# EAGLE board V1.0.0 (EAGLE 6.6.0)
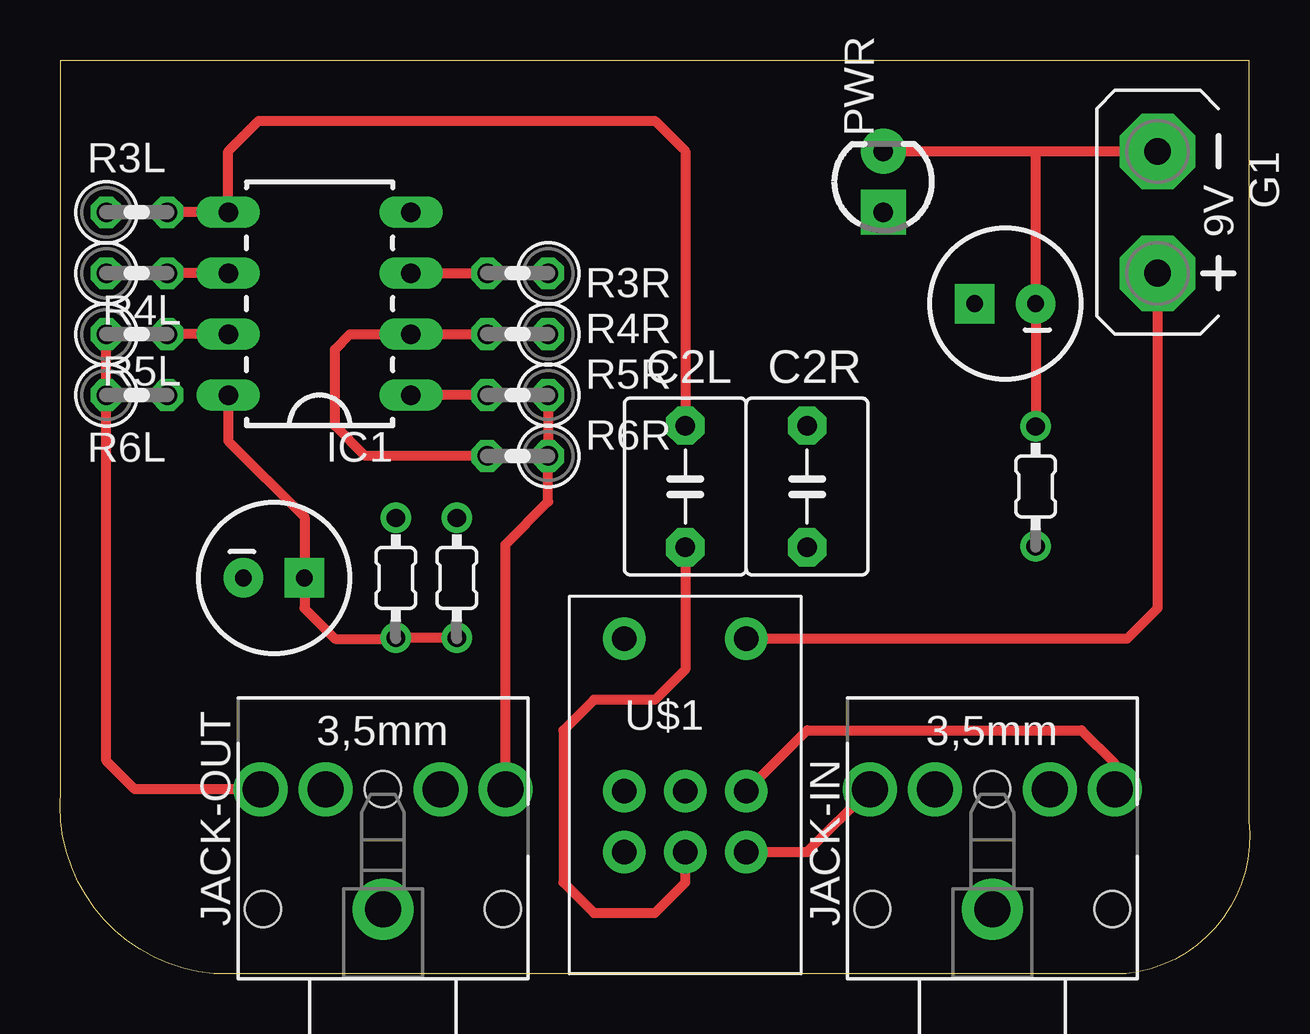
[diagram p0: board, top side]
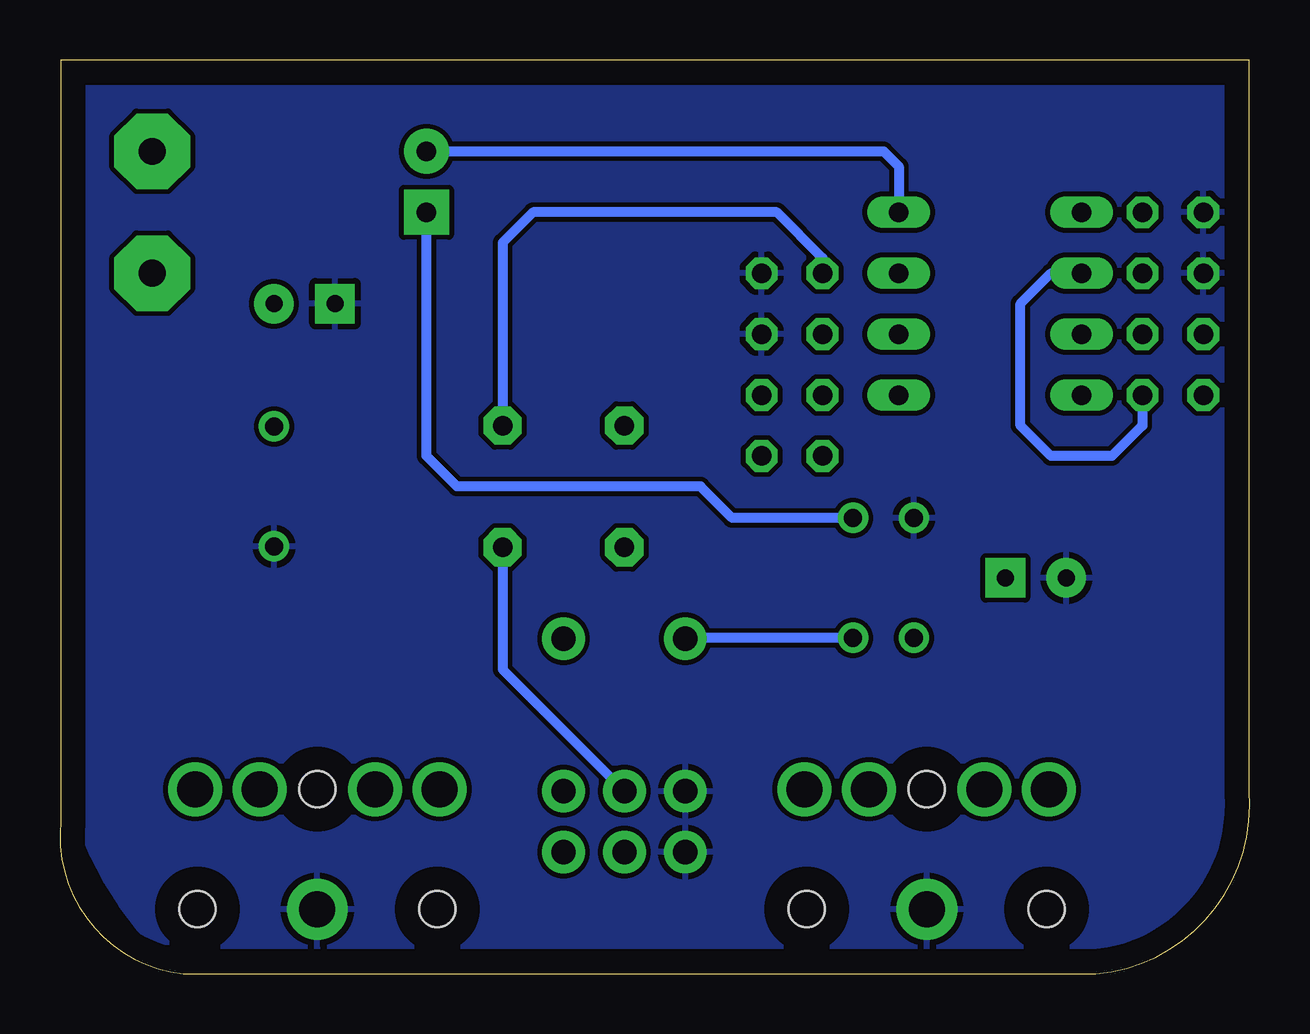
[diagram p1: board, bottom side, seen from below]

Size 49.59 x 38.1 mm. Coordinates in mm from the lower left corner, seen from the top.
Outline: 49.56,38.1 49.56,6.38 arc-90 44.45,0 6.41,0 arc-90 0.03,7.65 0.03,38.1 49.56,38.1
Copper layers (1*16): Top 0.035mm / dielectric 1.5mm / Bottom 0.035mm
Design rules "default": minimum track width 10mil, minimum drill 24mil, track to track 8mil, track to pad 8mil, pad to pad 8mil, via to via 8mil, smd to smd 8mil, copper to edge 40mil, drill to drill 8mil, minimum pad ring 10mil, minimum via ring 8mil, stop-mask expansion 4mil, vias tented up to drill 0mil, thermal gap 10mil
Net classes: 0 default: width 0.254 mm, drill 0.305 mm, clearance 0.152 mm

## Footprints (pad centres in the part's own frame; a part is rotated, then mirrored left to right if it is on the bottom)
CPOL-RADIAL-6.3MM = drill 0.7 pad 1.651 square: 1 1.27,0 | drill 0.7 pad 1.651: 2 -1.27,0
C5B5 = drill 0.813 pad 1.6 octagon: 1 -2.54,0; 2 2.54,0
AB9V = drill 1.118 pad 3.15 octagon: + 0,2.54; - 0,-2.54
DIL-8 = drill 0.813 long: 1 -3.81,-3.81; 2 -1.27,-3.81; 3 1.27,-3.81; 4 3.81,-3.81; 5 3.81,3.81; 6 1.27,3.81; 7 -1.27,3.81; 8 -3.81,3.81
STX3100 = drill 1.5 pad 2.54: 1 2.7,-0.1 | drill 1.5: 2 7.7,5; 3 7.7,2.3; 4 7.7,-2.5; 5 7.7,-5.2 | hole 1.5: 2.7,4.9; 2.7,-5.1; 7.7,-0.1
LED3MM-MINUS = drill 0.813 pad 1.88 square: A -1.27,0 | drill 0.813 pad 1.88: K 1.27,0
1/6W-RES-OUTLINE = drill 0.762: 1 -2.5,0; 2 2.5,0
0207/2V = drill 0.813 octagon: 1 -1.27,0; 2 1.27,0
ALPS_RK0971221Z0X = drill 1.016 pad 1.778: G1 2.54,-2.54; G2 0,-2.54; I1 2.54,2.54; I2 0,2.54; O1 2.54,0; O2 0,0; S1 -6.35,-2.54; S2 -6.35,2.54

## Placement (x,y rotation side)
C1L  220uF  [CPOL-RADIAL-6.3MM]  39.4,27.94 180 top
C1R  220uF  [CPOL-RADIAL-6.3MM]  8.92,16.51 0 top
C2L  0.1uF  [C5B5]  26.06,20.32 270 top
C2R  0.1uF  [C5B5]  31.14,20.32 270 top
G1  AB9V  [AB9V]  45.75,31.75 180 top
IC1  OPA2134P  [DIL-8]  10.82,27.94 90 top
JACK-IN  STEREOJACK  [STX3100]  38.76,0 90 top
JACK-OUT  STEREOJACK  [STX3100]  13.36,0 90 top
PWR  [LED3MM-MINUS]  34.32,33.02 90 top
R1  10k  [1/6W-RES-OUTLINE]  16.54,16.51 270 top
R2L  4.7k  [1/6W-RES-OUTLINE]  40.67,20.32 270 top
R2R  4.7k  [1/6W-RES-OUTLINE]  14,16.51 270 top
R3L  100k  [0207/2V]  3.2,31.75 0 top
R3R  100k  [0207/2V]  19.08,29.21 180 top
R4L  2k  [0207/2V]  3.2,29.21 0 top
R4R  2k  [0207/2V]  19.08,26.67 180 top
R5L  47R  [0207/2V]  3.2,26.67 0 top
R5R  47R  [0207/2V]  19.08,24.13 180 top
R6L  10k  [0207/2V]  3.2,24.13 0 top
R6R  10k  [0207/2V]  19.08,21.59 180 top
U$1  [ALPS_RK0971221Z0X]  26.06,7.62 270 top

## Library data of the parts
C1L C1R IC1 JACK-IN JACK-OUT PWR R1 R2L R2R = akafugu
C2L C2R = capacitor-wima
G1 = battery
R3L R3R R4L R4R R5L R5R R6L R6R = resistor
U$1 = audio-pots

## Nets
GND: C1L.1 C1R.2 JACK-IN.1 JACK-OUT.1 R2L.2 R2R.1 R3L.1 R3R.1 R4L.1 R4R.1 U$1.G1 U$1.G2
INPUT-L: JACK-IN.2 U$1.I1
INPUT-R: JACK-IN.5 U$1.I2
L+: C2L.1 IC1.5 R3L.2
L-: IC1.6 R4L.2 R6L.2
N$1: PWR.A R1.1
N$3: G1.+ U$1.S2
OP-L: IC1.7 R5L.2
OP-R: IC1.1 R5R.2
OUTPUT-L: JACK-OUT.2 R5L.1 R6L.1
OUTPUT-R: JACK-OUT.5 R5R.1 R6R.1
R+: C2R.1 IC1.3 R3R.2
R-: IC1.2 R4R.2 R6R.2
V+: C1R.1 IC1.8 R1.2 R2R.2 U$1.S1
V-: C1L.2 G1.- IC1.4 PWR.K R2L.1
VOLUME-OUT-L: C2L.2 U$1.O1
VOLUME-OUT-R: C2R.2 U$1.O2

## Tracks (layer width: path | path; a pad name or v marks a point on that pad's centre or on a via)
GND
  pour Bottom: 0.03,38.1 49.56,38.1 49.56,10.88 arc-45 45.46,0.98 44.48,0 10.91,0 arc-45 1.01,4.1 0.03,5.08
INPUT-L
  Top 0.406: U$1.I1 31.14,5.08 JACK-IN.2
INPUT-R
  Top 0.406: U$1.I2 31.14,10.16 42.57,10.16 43.96,8.77 JACK-IN.5
L+
  Top 0.406: R3L.2 IC1.5 7.01,34.29 8.28,35.56 24.79,35.56 26.06,34.29 C2L.1
L-
  Top 0.406: IC1.6 R4L.2
  Bottom 0.406: R6L.2 4.47,22.86 5.74,21.59 8.28,21.59 9.55,22.86 9.55,27.94 8.28,29.21 IC1.6
N$1
  Bottom 0.406: R1.1 21.58,19.01 22.89,20.32 33.05,20.32 34.32,21.59 PWR.A
N$3
  Top 0.406: U$1.S2 44.48,13.97 45.75,15.24 G1.+
OP-L
  Top 0.406: IC1.7 R5L.2
OP-R
  Top 0.406: R5R.2 IC1.1
OUTPUT-L
  Top 0.406: R5L.1 R6L.1 1.93,8.89 3.12,7.7 JACK-OUT.2
OUTPUT-R
  Top 0.406: R5R.1 R6R.1 20.35,19.68 18.56,17.9 JACK-OUT.5
R+
  Top 0.406: IC1.3 R3R.2
  Bottom 0.406: R3R.2 17.81,29.84 19.71,31.75 29.87,31.75 31.14,30.48 C2R.1
R-
  Top 0.406: R4R.2 IC1.2 12.09,26.67 11.46,26.04 11.46,22.86 12.73,21.59 R6R.2
V+
  Top 0.406: R1.2 R2R.2 13.96,13.97 11.46,13.97 10.19,15.24 C1R.1 10.19,19.05 7.01,22.23 IC1.8
  Bottom 0.406: R1.2 23.48,14.01 U$1.S1
V-
  Top 0.406: R2L.1 C1L.2 40.67,34.29 | PWR.K 40.67,34.29 | 40.67,34.29 G1.-
  Bottom 0.406: PWR.K 15.27,34.29 14.63,33.66 IC1.4
VOLUME-OUT-L
  Top 0.406: U$1.O1 26.06,3.81 24.79,2.54 22.25,2.54 20.98,3.81 20.98,10.16 22.25,11.43 24.79,11.43 26.06,12.7 C2L.2
VOLUME-OUT-R
  Bottom 0.406: C2R.2 31.14,12.7 U$1.O2